# Altium PCB Assignment.PcbDoc
Units mm, origin at the board's own origin, x right, y up, seen from the top; angles counter-clockwise.
Board outline 84.33 x 68.07 mm, 2 copper layers (Top Layer, Bottom Layer); 49 components, 55 nets, 222 pads, 53 vias.
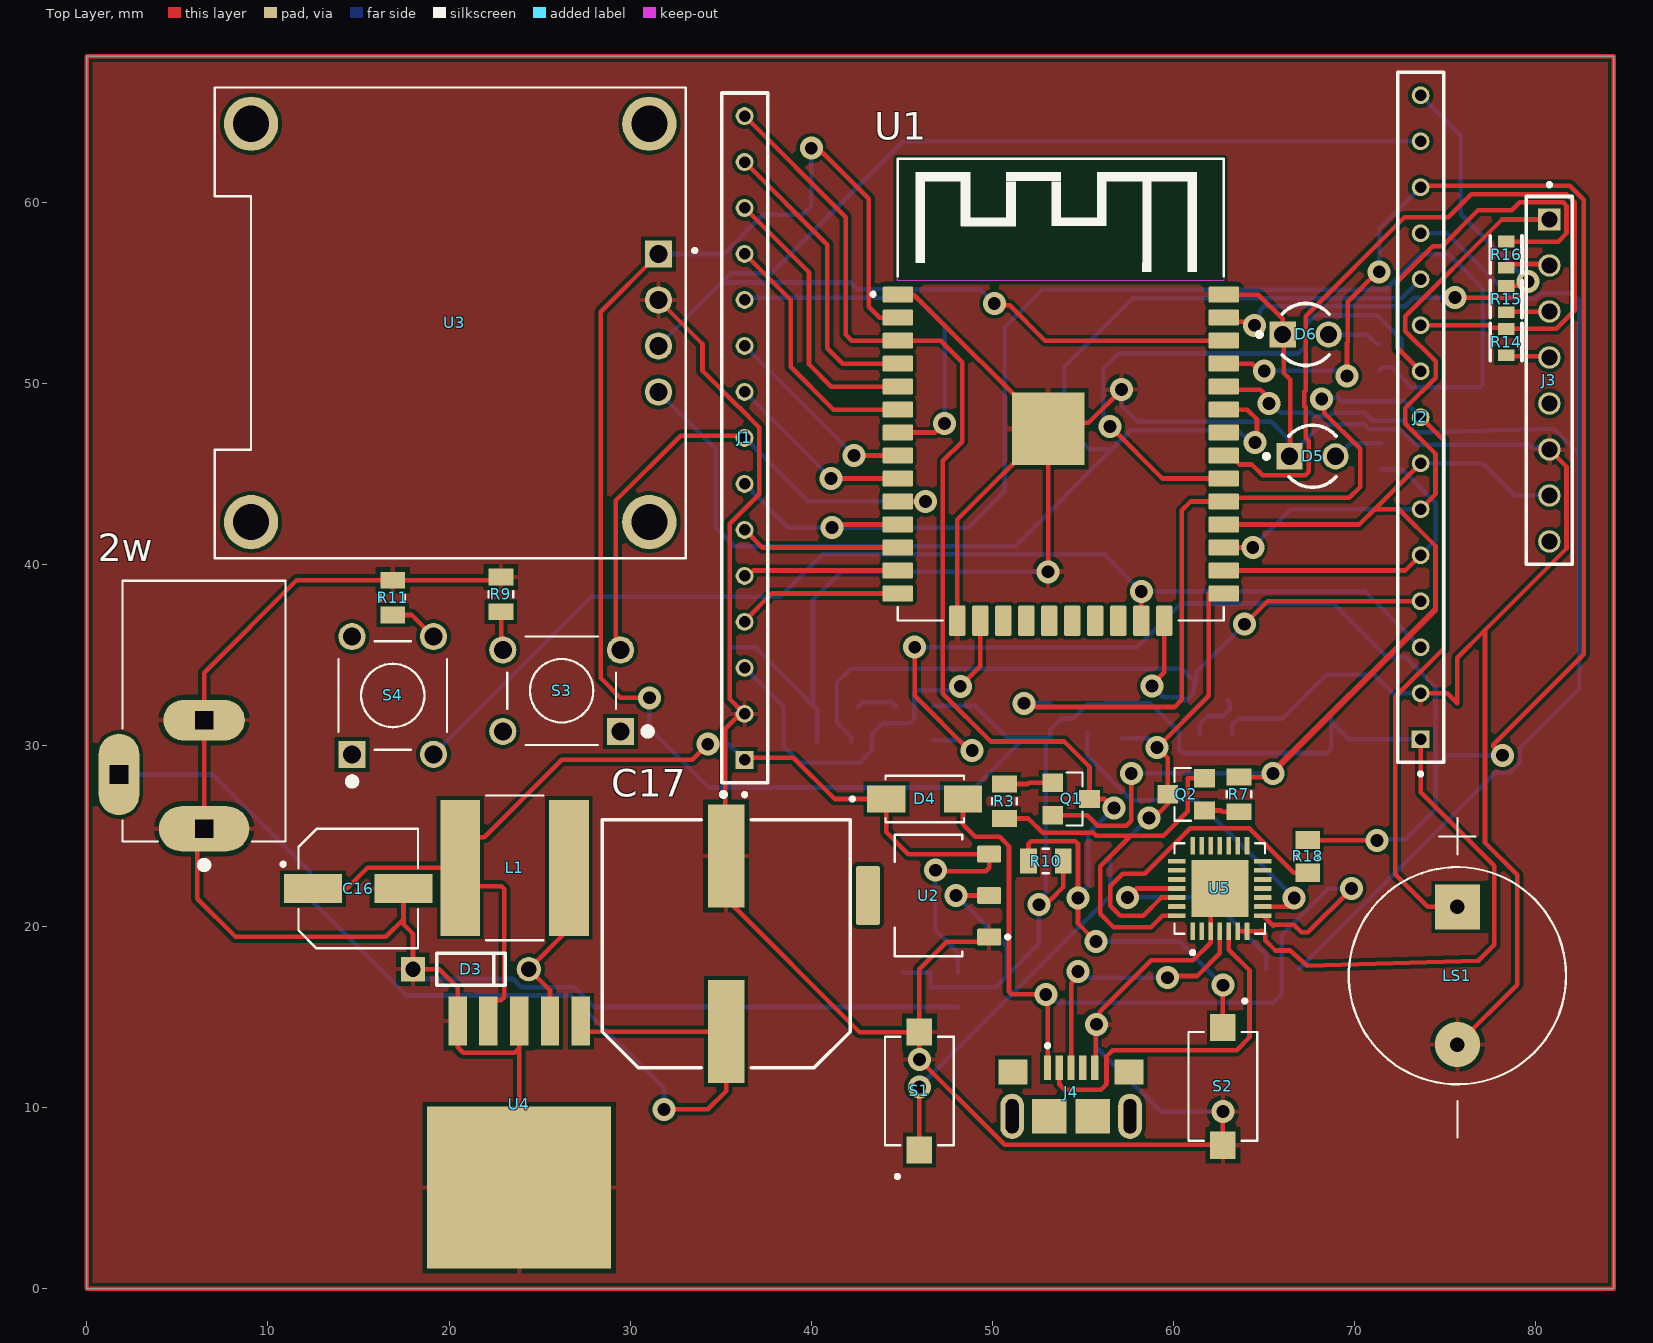
[diagram p0: Top Layer view]
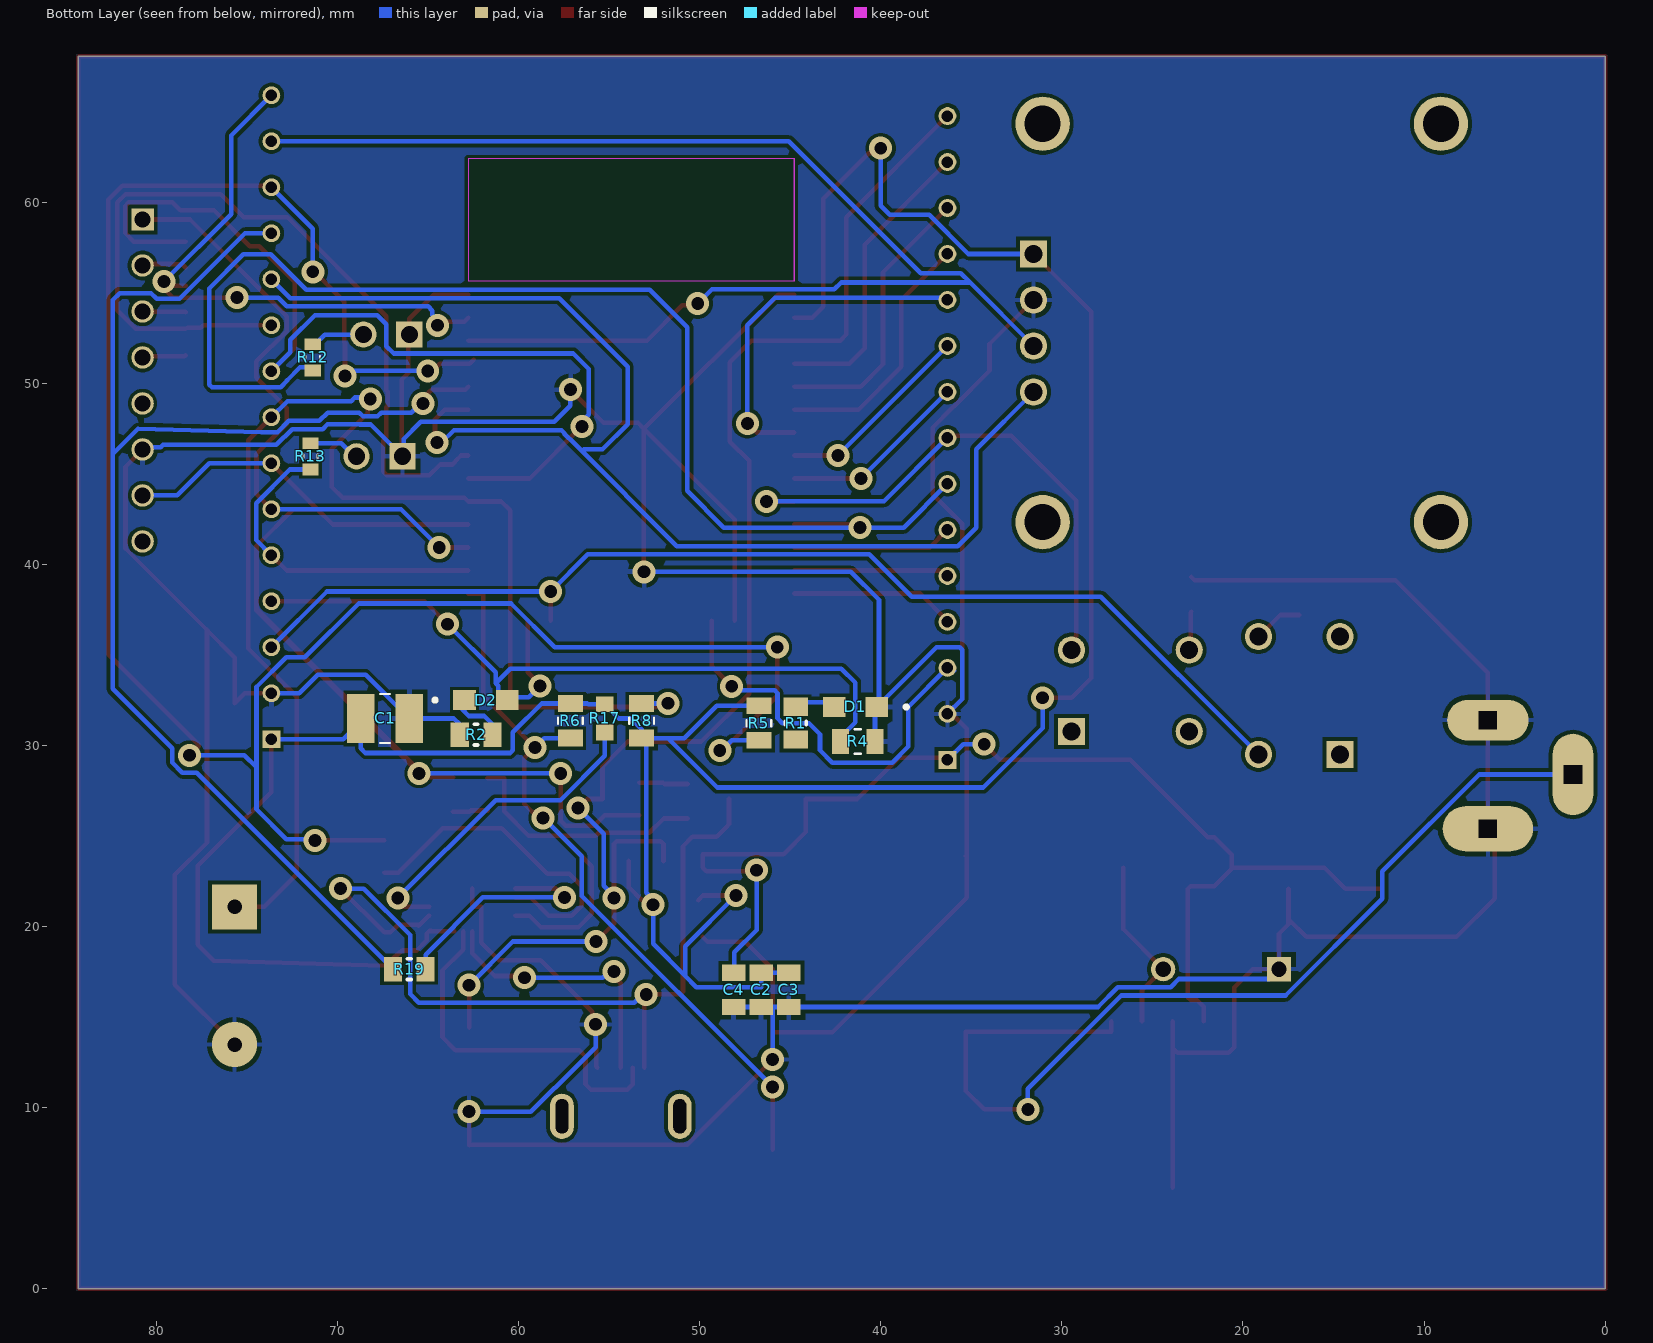
[diagram p1: Bottom Layer view, seen from below]
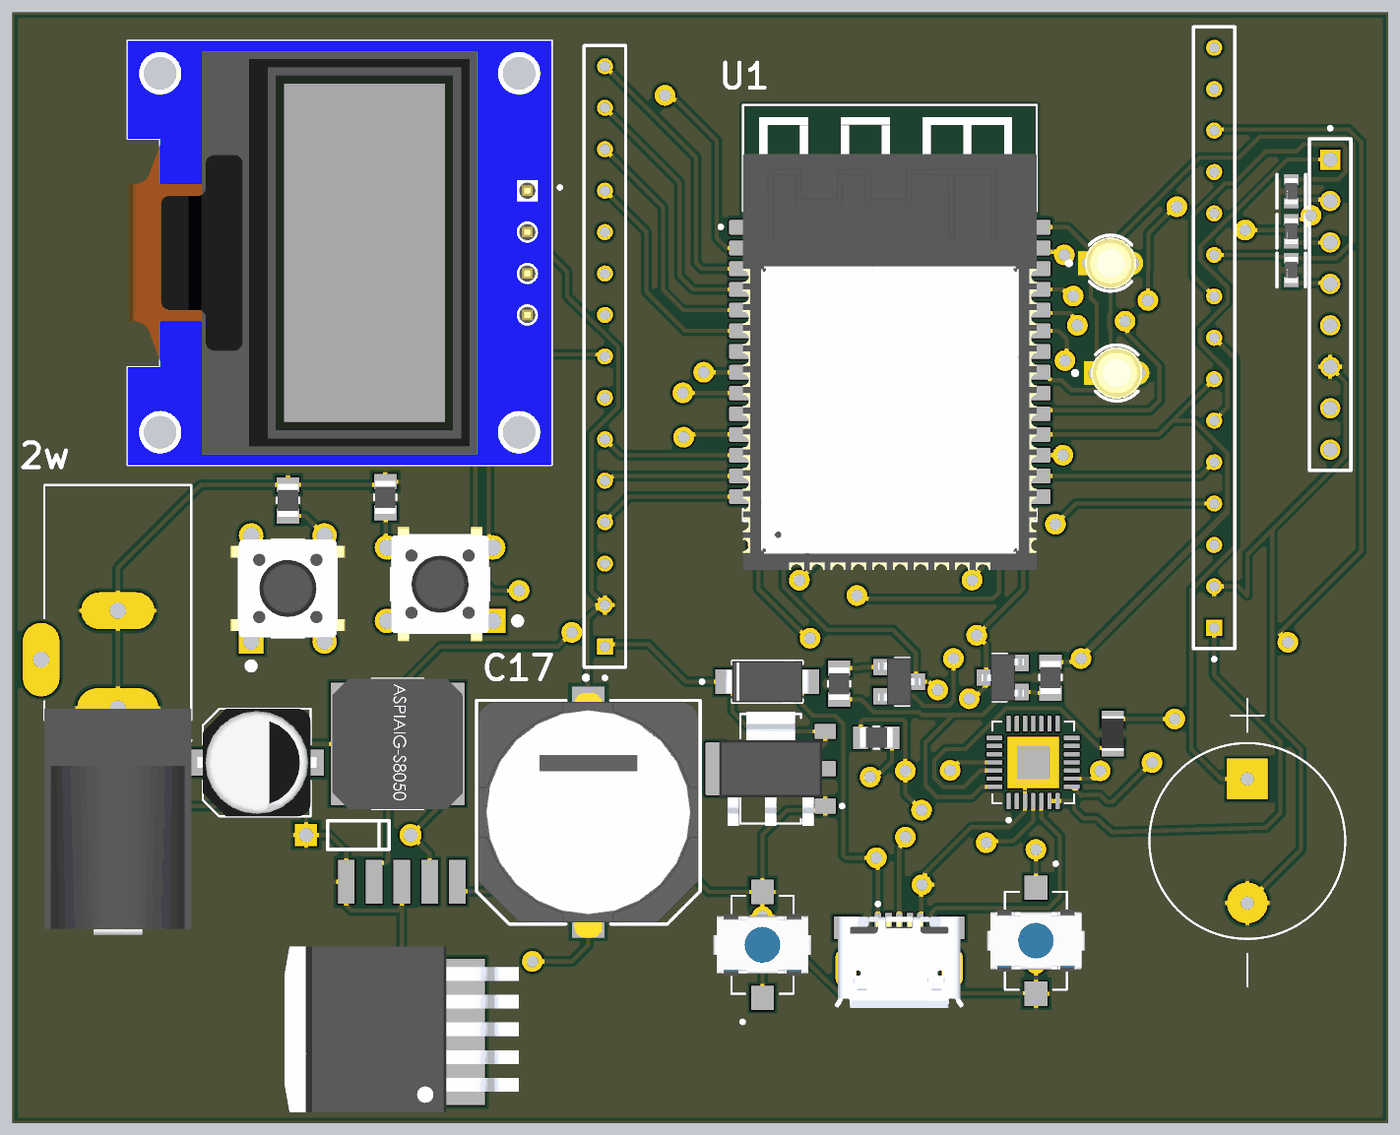
[diagram p2: 3D render of the assembled board from above, using the file's embedded part models]
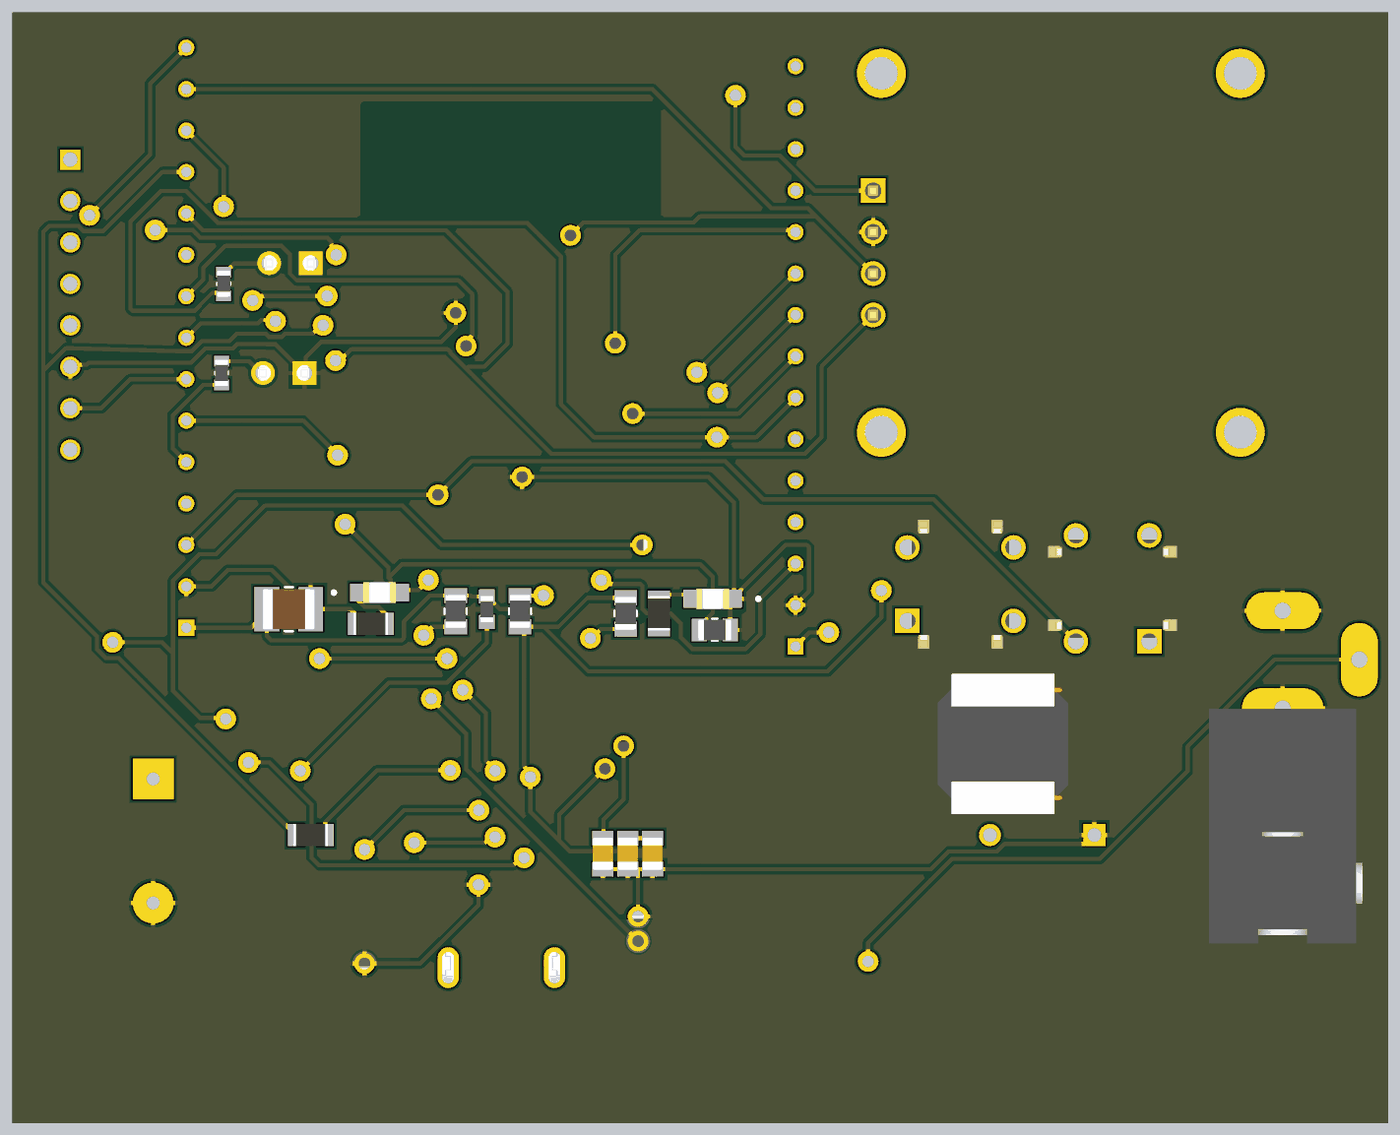
[diagram p3: 3D render of the assembled board from below, using the file's embedded part models]

## Layer stack, top to bottom
Top Solder: solder mask 0.0102, Solder Resist, Dk 3.5
Top Layer: signal copper 0.0356
Dielectric 1: dielectric 0.32, FR-4, Dk 4.8
Bottom Layer: signal copper 0.0356
Bottom Solder: solder mask 0.0102, Solder Resist, Dk 3.5

## Board outline
0,0 0,68.072 84.328,68.072 84.328,0

## Design rules (kind name [scope] priority, off if disabled: settings)
Clearance [All] p1: gap=0.2 ignorepadtopadclearanceinfootprint=TRUE
HoleSize [All] p1: absolutevalues=TRUE maxlimit=3.5 minlimit=0.025 maxpercent=80.000 minpercent=20.000
MinimumSolderMaskSliver [HasFootprint('No Footprint') vs HasFootprint('No Footprint')] p1: minsoldermaskwidth=0.02
PolygonConnect [All] p1: connectstyle=Relief reliefconductorwidth=0.254 reliefentries=4 polygonreliefangle="90 Angle" airgapwidth=0.254
RoutingVias [All] p1: holewidth=0.711 width=1.27 viastyle="Through Hole" minholewidth=0.711 minwidth=1.27 maxholewidth=0.711 maxwidth=1.27
SilkToSolderMaskClearance [IsPad] p1: minsilkscreentomaskgap=0.02 clearancetoexposedcopper=TRUE
SolderMaskExpansion [All] p1: expansion=0.102 istentingtop=FALSE
SupplyNets "Schematic Supply Nets_6" [InNet('VDD3V3')] p1: voltage=0.000
SupplyNets "Schematic Supply Nets_5" [InNet('12V')] p2: voltage=0.000
SupplyNets "Schematic Supply Nets_4" [InNet('3V3')] p3: voltage=0.000
SupplyNets "Schematic Supply Nets_3" [InNet('VCC3V3')] p4: voltage=0.000
SupplyNets "Schematic Supply Nets_2" [InNet('VIN')] p5: voltage=0.000
SupplyNets "Schematic Supply Nets_1" [InNet('VCCUSB')] p6: voltage=0.000
SupplyNets "Schematic Supply Nets" [InNet('GND')] p7: voltage=0.000
Width [All] p1: maxlimit=0.254 minlimit=0.254 preferedwidth=0.254
27 further rules are at their usual default settings.

## Classes and differential pairs
component class "Power Supply": 2w C16 C17 D3 L1 U4
component class "MCU & Peripherals": C1 C2 C3 C4 D1 D2 D4 D5 D6 J1 J2 J3 J4 LS1 Q1 Q2 R1 R2 R3 R4 R5 R6 R7 R8 R9 R10 R11 R12 R13 R14 R15 R16 R17 R18 R19 S1 S2 S3 S4 U1 U3 U5

## Components (designator, comment, footprint, x,y, rotation, side; value= is the part's Value field where it differs from the comment)
2w "PJ-002AH" CUI_PJ-002AH 6.47,25.403 r90 top (schematic designator J8)
C1 "GRM32EC70J107ME15L" CAPC3225X270N 67.381,31.496 r180 bottom
C2 "100nF" WCAP-CSGP_0805_L2W1.25H0.8_Reflow 46.609,16.51 r270 bottom
C3 "10μF" WCAP-CSGP_0805_L2W1.25H1.25 45.085,16.51 r270 bottom
C4 "10μF" WCAP-CSGP_0805_L2W1.25H1.25 48.133,16.51 r270 bottom
C16 "EEEFP0J221AP" CAP_EEEFP0J221AP 14.986,22.098 r0 top
C17 "EEV-FK1V681Q" FP-FKH13-MFG 35.306,19.05 r270 top
D1 "AP2012MGC" LED_AP2012MGC 41.402,32.131 r0 bottom
D2 "AP2012MGC" LED_AP2012MGC 61.817,32.512 r180 bottom
D3 "BAT46" STM-DO-35-2 21.209,17.653 r0 top
D4 "SS14" DIOM4325X250N 46.272,27.051 r0 top
D5 "HLMP-1719" FP-HLMP-1719-MFG 67.691,45.974 r0 top
D6 "HLMP-1719" FP-HLMP-1719-MFG 67.31,52.705 r0 top
J1 "TS-115-G-AA" SAMTEC_TS-115-G-AA 36.322,46.99 r90 top
J2 "TS-115-G-AA" SAMTEC_TS-115-G-AA 73.66,48.133 r90 top
J3 "RFID module connector" SAMTEC_SL-108-T-19 80.772,59.055 r90 top
J4 "2013499-1" TE_2013499-1 54.356,9.525 r0 top
L1 "ASPIAIG-S8050-330M-T" IND_ASPIAIG-S8050-330M-T 23.622,23.241 r180 top
LS1 "Buzzer" XDCR_CMI-1210-5-95T 75.692,17.289 r270 top
Q1 "SMD-TRANSISTORS-NPN-25V-500MW(SOT-23)" SOT-23 54.356,27.051 r270 top
Q2 "SMD-TRANSISTORS-NPN-25V-500MW(SOT-23)" SOT-23 60.706,27.305 r90 top
R1 "RC0805FR-071KL" RESC2013X60X35NL10T20 44.704,31.242 r90 bottom
R2 "RC0805FR-071KL" RESC2013X60X35NL10T20 62.357,30.607 r0 bottom
R3 "RC0805FR-0710KL" RESC2012X60N 50.673,26.924 r270 top
R4 "RC0805FR-0710KL" RESC2012X60N 41.275,30.226 r180 bottom
R5 "RC0805FR-0710KL" RESC2012X60N 46.736,31.242 r270 bottom
R6 "RC0805FR-0710KL" RESC2012X60N 57.15,31.369 r270 bottom
R7 "RC0805FR-0710KL" RESC2012X60N 63.627,27.305 r90 top
R8 "RC0805FR-0710KL" RESC2012X60N 53.213,31.369 r90 bottom
R9 "RC0805FR-0710KL" RESC2012X60N 22.86,38.354 r270 top
R10 "RC0805FR-0710KL" RESC2012X60N 52.959,23.622 r180 top
R11 "RC0805FR-0710KL" RESC2012X60N 16.891,38.166 r270 top
R12 "ERJPA3F5100V" RES_ERJPA3F5100V 71.374,51.435 r90 bottom
R13 "ERJPA3F5100V" RES_ERJPA3F5100V 71.501,45.974 r90 bottom
R14 "22" FP-ERJ3G-MFG 78.386,52.285 r90 top
R15 "22" FP-ERJ3G-MFG 78.386,54.661 r90 top
R16 "22" FP-ERJ3G-MFG 78.386,57.111 r90 top
R17 "CRG0603F4K7" RESC1608X55N 55.245,31.496 r270 bottom
R18 "RC0805FR-071KL" RESC2013X60X35NL10T20 67.437,23.876 r90 top
R19 "RC0805FR-071KL" RESC2013X60X35NL10T20 66.04,17.653 r0 bottom
S1 "TS10-63-26-BE-250-SMT-TR" SW_TS10-63-26-BE-250-SMT-TR 45.974,10.922 r90 top
S2 "TS10-63-26-BE-250-SMT-TR" SW_TS10-63-26-BE-250-SMT-TR 62.738,11.176 r270 top
S3 "FSM8JH" SW_FSM8JH 26.219,33.029 r180 top
S4 "FSM8JH" SW_FSM8JH 16.891,32.766 r90 top
U1 "ESP-WROOM-32" MODULE_ESP-WROOM-32 53.786,46.653 r0 top
U2 "AMS1117-3.3" SOT229P700X180-4N 46.482,21.717 r90 top
U3 "DM-OLED096-636" MODULE_DM-OLED096-636 20.066,53.34 r270 top
U4 "LM2596S-ADJ" TO170P1435X465-6N 23.876,5.74 r180 top
U5 "CP2102" QFN50P500X500X100-29N 62.568,22.106 r90 top

## Footprints (in the part's own frame and the unit in brackets; to place one, negate y for a bottom-side part, rotate by r counter-clockwise, add the part's x,y. Pads: shape width x height; smd on the part's side, far side on the other; paste and mask are expansions set on the pad)
CAP_EEEFP0J221AP [mm]
  rect 3.2x1.6 smd: 1(-2.5,0) 2(2.5,0)
  silkscreen extent -4.25,-3.3 3.3,3.3, body extent -3.65,-3.3 3.65,3.3, height 5.8
CAPC3225X270N [mm]
  rect 1.53x2.72 smd: 1(-1.341,0) 2(1.341,0)
  silkscreen extent -0.26,-1.35 0.26,1.35, body extent -1.6,-1.25 1.6,1.25, height 2.7
CUI_PJ-002AH [mm]
  oval 2.5x5 hole 1 square: 1(0,0)
  oval 2.25x4.5 hole 1 square: 2(6,0)
  oval 4.5x2.25 hole 1 square: 3(3,4.7)
  silkscreen extent -2.2,-4.5 13.7,4.5, body extent -14.4,-4.5 0,4.9, height 4.5
DIOM4325X250N [mm]
  rect 2.12x1.5 smd: A(2.115,0) C(-2.115,0)
  silkscreen extent -4.1,-1.28 2.16,1.28, body extent -2.57,-1.28 2.57,1.28, height 2.5
FP-ERJ3G-MFG [mm]
  rect 0.65x0.9 smd paste+0 mask+0: 1(-0.725,0) 2(0.725,0)
  silkscreen extent -1.03,-0.88 1.03,0.87, body extent -1.15,-0.58 1.15,0.58, height 0.25
FP-FKH13-MFG [mm]
  rect 5.7x2 smd paste+0 mask+0: 1(-4.85,0) 2(4.85,0)
  silkscreen extent -8.37,-6.85 6.85,6.85, body extent -7.95,-7.1 7.95,7.1, height 0.25
FP-HLMP-1719-MFG [mm]
  rect 1.45x1.45 hole 0.95 paste-2539.97 mask+0: 1(-1.27,0)
  round 1.45 hole 0.95 paste-2539.97 mask+0: 2(1.27,0)
  silkscreen extent -2.67,-1.71 1.3,1.71, body extent -2.22,-2.22 2.22,2.22, height 0.25
IND_ASPIAIG-S8050-330M-T [mm]
  rect 2.2x7.5 smd: 1(-3,0) 2(3,0)
  silkscreen extent -1.58,-4 1.58,4, body extent -4,-4.3 4,4.3, height 2.45
LED_AP2012MGC [mm]
  rect 1.25x1.1 smd: A(1.175,0) C(-1.175,0)
  silkscreen extent -2.9,-0.1 -2.7,0.1, body extent -1,-0.63 1,0.63, height 1.1
MODULE_DM-OLED096-636 [mm]
  rect 1.508x1.508 / inner round 1.508 / far side rect 1.508x1.508 hole 1: 1(-3.81,11.5)
  round 1.508 hole 1: 2(-1.27,11.5) 3(1.27,11.5) 4(3.81,11.5)
  round 3 hole 2: S1(-11,11) S2(11,11) S3(11,-11) S4(-11,-11)
  silkscreen extent -13,-13 13,13.6, body extent -13,-13 13,13, height 5.66
MODULE_ESP-WROOM-32 [mm]
  rrect22% 1.7x0.9 smd: 1(-9,8.255) 2(-9,6.985) 3(-9,5.715) 4(-9,4.445) 5(-9,3.175) 6(-9,1.905) 7(-9,0.635) 8(-9,-0.635) 9(-9,-1.905) 10(-9,-3.175) 11(-9,-4.445) 12(-9,-5.715) 13(-9,-6.985) 14(-9,-8.255) 25(9,-8.255) 26(9,-6.985) 27(9,-5.715) 28(9,-4.445) 29(9,-3.175) 30(9,-1.905) 31(9,-0.635) 32(9,0.635) 33(9,1.905) 34(9,3.175) 35(9,4.445) 36(9,5.715) 37(9,6.985) 38(9,8.255)
  rect 4x4 smd: 1.1(-0.7,0.845)
  rrect22% 0.9x1.7 smd: 15(-5.715,-9.755) 16(-4.445,-9.755) 17(-3.175,-9.755) 18(-1.905,-9.755) 19(-0.635,-9.755) 20(0.635,-9.755) 21(1.905,-9.755) 22(3.175,-9.755) 23(4.445,-9.755) 24(5.715,-9.755)
  Keep-Out Layer region: 9,9.012 -9.012,9.012 -9.012,15.75 9,15.75
  Keep-Out Layer region: 9,9.026 -9.026,9.026 -9.026,15.75 9,15.75
  silkscreen extent -10.46,-9.75 9,15.75, body extent -9,-12.75 9,12.75, height 3.25
QFN50P500X500X100-29N [mm]
  rrect25% 0.97x0.26 smd: 1(-2.37,1.5) 2(-2.37,1) 3(-2.37,0.5) 4(-2.37,0) 5(-2.37,-0.5) 6(-2.37,-1) 7(-2.37,-1.5) 15(2.37,-1.5) 16(2.37,-1) 17(2.37,-0.5) 18(2.37,0) 19(2.37,0.5) 20(2.37,1) 21(2.37,1.5)
  rrect25% 0.26x0.97 smd: 8(-1.5,-2.37) 9(-1,-2.37) 10(-0.5,-2.37) 11(0,-2.37) 12(0.5,-2.37) 13(1,-2.37) 14(1.5,-2.37) 22(1.5,2.37) 23(1,2.37) 24(0.5,2.37) 25(0,2.37) 26(-0.5,2.37) 27(-1,2.37) 28(-1.5,2.37)
  rect 3.15x3.15 smd paste-0.575: 29(0,0)
  silkscreen extent -3.64,-2.5 2.5,2.5
RES_ERJPA3F5100V [mm]
  rect 0.65x0.9 smd: 1(-0.725,0) 2(0.725,0)
  silkscreen extent -0.08,-0.4 0.08,0.4, body extent -0.8,-0.4 0.8,0.4, height 0.45
RESC1608X55N [mm]
  rect 0.87x0.97 smd: 1(-0.78,0) 2(0.78,0)
  body extent -0.8,-0.4 0.8,0.4, height 0.55
RESC2012X60N [mm]
  rect 0.92x1.38 smd: 1(-0.955,0) 2(0.955,0)
  silkscreen extent -0.17,-0.68 0.17,0.68, body extent -1,-0.63 1,0.63, height 0.6
RESC2013X60X35NL10T20 [mm] "Chip Resistor, 2-Leads, Body 2.1x1.35mm, IPC Medium Density"
  rect 1x1.35 smd: 1(-0.9,0) 2(0.9,0)
  silkscreen extent -0.1,-0.58 0.1,0.58, body extent -1.05,-0.68 1.05,0.67, height 0.6
SAMTEC_SL-108-T-19 [mil]
  rect 48.78x48.78 hole 35: 01(0,0)
  round 48.78 hole 35: 02(-100,0) 03(-200,0) 04(-300,0) 05(-400,0) 06(-500,0) 07(-600,0) 08(-700,0)
  silkscreen extent -750,-50 80,50
SAMTEC_TS-115-G-AA [mm]
  rect 0.985x0.985 hole 0.635: 01(-17.78,0)
  round 0.985 hole 0.635: 02(-15.24,0) 03(-12.7,0) 04(-10.16,0) 05(-7.62,0) 06(-5.08,0) 07(-2.54,0) 08(0,0) 09(2.54,0) 10(5.08,0) 11(7.62,0) 12(10.16,0) 13(12.7,0) 14(15.24,0) 15(17.78,0)
  silkscreen extent -19.8,-1.27 19.05,1.27
SOT229P700X180-4N [mm]
  rrect15% 0.93x1.31 smd: 1(-2.29,-3.345) 2(0,-3.345) 3(2.29,-3.345)
  rrect15% 3.24x1.31 smd: 4(0,3.345)
  silkscreen extent -3.36,-4.47 3.36,1.86, body extent -3.5,-3.15 3.5,3.15, height 1.8
SOT-23 [mil]
  rect 40x45 smd: 1(-35,-40) 2(35,-40) 3(0,40)
  silkscreen extent -58,-10 58,25, body extent -57,-51 57,51, height 55
STM-DO-35-2 [mm] "THD, 2-Leads, Dia 1.765 mm, Body Length 3.775 mm"
  rect 1.35x1.35 hole 0.85: 1(-3.2,0)
  round 1.35 hole 0.85: 2(3.2,0)
  silkscreen extent -1.89,-0.88 1.89,0.88, body extent -1.89,-0.88 1.89,0.88, height 1.76
SW_FSM8JH [mm]
  rect 1.498x1.498 / inner round 1.498 / far side rect 1.498x1.498 hole 0.99: 1(-3.25,2.25)
  round 1.498 hole 0.99: 2(-3.25,-2.25) 3(3.25,2.25) 4(3.25,-2.25)
  silkscreen extent -4.95,-3 3,3, body extent -3,-3.95 3,3.95, height 9.5
SW_TS10-63-26-BE-250-SMT-TR [mm]
  rect 1.5x1.4 smd: 1(-3.25,0) 2(3.25,0)
  silkscreen extent -4.82,-1.9 3,1.9, body extent -1.9,-3.7 1.9,3.7, height 2.2
TE_2013499-1 [mm]
  rect 0.4x1.35 smd: 1(-1.3,2.675) 2(-0.65,2.675) 3(0,2.675) 4(0.65,2.675) 5(1.3,2.675)
  rect 1.6x1.4 smd: SH1(-3.2,2.45) SH4(3.2,2.45)
  rect 1.9x1.9 smd: SH2(-1.2,0) SH3(1.2,0)
  oval 1.31x2.5 hole 0.71 slot 1.9 at 90 deg: SH5(3.255,0) SH6(-3.255,0)
  silkscreen extent -1.4,3.8 -1.2,4, body extent -4,-2.49 4,3.11, height 2.76
TO170P1435X465-6N [mil]
  rect 40x106 smd: 1(-134,-356) 2(-67,-356) 3(0,-356) 4(67,-356) 5(134,-356)
  rect 400x352 smd: 6(0,6)
  body extent -282,-200 282,200, height 183
WCAP-CSGP_0805_L2W1.25H0.8_Reflow [mm] "Ceramic Capacitors, body 2x1.25mm"
  rect 0.9x1.3 smd: 1(-0.95,0) 2(0.95,0)
  body extent -1,-0.62 1,0.63, height 0.8
WCAP-CSGP_0805_L2W1.25H1.25 [mm] "Ceramic Capacitors, body 2x1.25mm"
  rect 0.9x1.3 smd: 1(-0.95,0) 2(0.95,0)
  body extent -1,-0.63 1,0.63, height 1.25
XDCR_CMI-1210-5-95T [mm]
  round 2.5 hole 0.8: N(3.8,0)
  rect 2.5x2.5 / inner round 2.5 / far side rect 2.5x2.5 hole 0.8: P(-3.8,0)
  silkscreen extent -8.69,-6 8.92,6

## Part data
2w: "2.0 x 6.5 mm, 5.0 A, Horizontal, Through Hole, Dc Power Jack Connector", Package=None, Check_prices=https://www.snapeda.com/parts/PJ-002AH/Same+Sky/view-part/?ref=eda, MF="Same Sky", MP=PJ-002AH, SnapEDA_Link=https://www.snapeda.com/parts/PJ-002AH/Same+Sky/view-part/?ref=snap
C1: "SMD capacitor X7S(EIA) with capacitance 100uF Tol.20%. Rated voltage 6.3Vdc 125C", Package="3225 Murata", Check_prices=https://www.snapeda.com/parts/GRM32EC70J107ME15L/Murata+Electronics+North+America/view-part/?ref=eda, MF="Murata Electronics", MP=GRM32EC70J107ME15L, SnapEDA_Link=https://www.snapeda.com/parts/GRM32EC70J107ME15L/Murata+Electronics+North+America/view-part/?ref=snap
C2: library part 885012207072, "WCAP-CSGP Multilayer Ceramic Chip Capacitor, General Purpose, size 0805, X7R, 100nF, 25V", Capacitance Tolerance=+/-10%, Case/Size Code=0805, Insulation Resistance=5GΩ, Manufacturer="Wurth Elektronik", Max Operating Temperature=125°C, Min Operating Temperature=-55°C, Rated Voltage (DC)=25V, Capacitance=100nF, Category="Multilayer Ceramic Chip Capacitors", Ceramic Type=X7R, ComponentLink1Description="Website Link", ComponentLink1URL=https://www.we-online.com/redexpert/article/885012207072?ad, ComponentLink2Description="Datasheet Link", ComponentLink2URL=https://www.we-online.com/redexpert/spec/885012207072?ad, Dissipation Factor=3.5%, Height=0.8mm, Length=2mm, Manufacturer Part Number=885012207072, Match Code=WCAP-CSGP, Mount="Surface Mount", Packaging="Tape and Reel", Technical Reference=X7R0805104K025DFCT10000, Width=1.25mm
C3 C4: library part 885012107027, "WCAP-CSGP Multilayer Ceramic Chip Capacitor, General Purpose, size 0805, X5R Class II, 10μF, 25V", Capacitance Tolerance=+/-10%, Case/Size Code=0805, Insulation Resistance=0.005GΩ, Manufacturer="Wurth Elektronik", Max Operating Temperature=85°C, Min Operating Temperature=-55°C, Rated Voltage (DC)=25V, Capacitance=10μF, Category="Multilayer Ceramic Chip Capacitors", Ceramic Type="X5R Class II", ComponentLink1Description="Website Link", ComponentLink1URL=https://www.we-online.com/redexpert/article/885012107027?ad, ComponentLink2Description="Datasheet Link", ComponentLink2URL=https://www.we-online.com/redexpert/spec/885012107027?ad, Dissipation Factor=12.5%, Height=1.25mm, Length=2mm, Manufacturer Part Number=885012107027, Match Code=WCAP-CSGP, Mount="Surface Mount", Packaging="Tape and Reel", Technical Reference=X5R0805106K025DFCT10000, Width=1.25mm
C16: "CAP ALUM 220UF 20% 6.3V SMD", Package="RADIAL-2 Panasonic", Check_prices=https://www.snapeda.com/parts/EEEFP0J221AP/Panasonic/view-part/?ref=eda, MF=Panasonic, MP=EEEFP0J221AP, SnapEDA_Link=https://www.snapeda.com/parts/EEEFP0J221AP/Panasonic/view-part/?ref=snap
C17: library part CMP-05427-002172-1, "CAP ALUM 680UF 20% 35V SMD", Capacitance=680uF, Case/Package=Radial, ESR (Equivalent Series Resistance)=60mR, Leakage Current=3uA, Max Operating Temperature=105°C, Min Operating Temperature=-55°C, Package Quantity=200, Ratings=AEC-Q200, Ripple Current=1.1A, Tolerance=20%, Voltage=35V, Construction=Cylindrical, Contact Plating=Tin, Diameter=12.5mm, Height=13.5mm, Height - Seated (Max)=0.531inch, Impedance=60mR, Lead Free="Lead Free", Length=14mm, Life (Hours)=5000Hour, Material=Aluminium, Mount="Surface Mount", Packaging="Tape and Reel", Radiation Hardening=No, Reach SVHC Compliant=Yes, Ripple Current (AC)=1.1A, RoHS Compliant=Yes, Series=FK, Termination=SMD/SMT, Voltage Rating=35V, Voltage Rating (DC)=35V, Width=900um
D1 D2: "Green 2 x 1.25 x 1.1 mm 120Â° Water Clear 70 mcd 2.1 V Chip LED Lamp SMT", Package="0805 Kingbright", Check_prices=https://www.snapeda.com/parts/AP2012MGC/Kingbright/view-part/?ref=eda, MF=Kingbright, MP=AP2012MGC, SnapEDA_Link=https://www.snapeda.com/parts/AP2012MGC/Kingbright/view-part/?ref=snap
D3: library part CMP-2000-05926-1, "Small Signal Schottky Diode, 150 mA, 100 V, -65 to 125 degC, 2-Pin DO-35, RoHS, Tape and Reel", Diode Case Style=DO-204AH, Forward Current If(AV)=150mA, Forward Surge Current Ifsm Max=750mA, Forward Voltage VF Max=1V, Manufacturer=STMicroelectronics, Operating Temperature Max=125°C, Package Description="2-Pin Axial Lead, Dia 1.765 mm, Body Length 3.775 mm", Package Reference=DO-35-2, Repetitive Reverse Voltage Vrrm Max=100V, Datasheet URL=http://www.st.com/content/ccc/resource/technical/document/datasheet/group1/11/76/e4/a3/df/07/49/14/CD00000767/files/CD00000767.pdf/jcr:content/translations/en.CD00000767.pdf, Datasheet Version="Rev. 2.1, 10/2001", Diode Configuration=Single, Diode Type=Schottky, Manufacturer URL=http://www.st.com/, Mounting Technology=ThroughHole, No. of Pins=2Pins, Packaging=Tape&Reel, Product Range=-, SVHC=NoSVHC(15-Jun-2015)
D4: "1A, 40V, Schottky Rectifier", Package="SMA-2 Taiwan Semiconductor", Check_prices=https://www.snapeda.com/parts/SS14/taiwan/view-part/?ref=eda, MF="Taiwan Semiconductor", MP=SS14, SnapEDA_Link=https://www.snapeda.com/parts/SS14/taiwan/view-part/?ref=snap
D5 D6: library part CMP-2000-06410-2, "LED YELLOW DIFFUSED T-1 T/H", Colour=Yellow, Forward Current=2mA, Forward Voltage=1.8V, Manufacturer=Broadcom, Package=0, Power Dissipation=17.5mW, Reverse Voltage=5V, Temperature="-40°C to +100°C", Temperature Range High=+100°C, Temperature Range Low=-40°C, Automotive=No, Category=Diode, ComponentLink2Description=Datasheet, ComponentLink2URL=https://docs.broadcom.com/docs/AV02-1557EN, Device Class L1=Optoelectronics, Device Class L2=LEDs, Device Class L3=unset, Digikey Description="LED YELLOW DIFFUSED T-1 T/H", Lead Free=Yes, Led Orientation=Straight, Luminous Intensity=2.1mcd, Manufacturer Part Number=HLMP-1719, Mouser Description="Standard LEDs - Through Hole Yellow Diffused 585nm 2.1mcd", Octopart=https://octopart.com/hlmp-1719-broadcom-71130405, RoHS=TRUE, Viewing Angle=50°, Wavelength=585nm
J1 J2 J4: Package=None, Availability=Unavailable, Price=None
  J1 J2: MF=Samtec, MP=TS-115-G-AA
  J4: MP=2013499-1
J3: library part SL-108-T-19, Package=None, Availability=Unavailable, MP=SL-108-T-19, Price=None
L1: "Inductor Power Shielded Wirewound 33uH 20% 100KHz Ferrite 2A 122mOhm DCR 3131 Automotive T/R", Package="Nonstandard Abracon", Availability="In Stock", Check_prices=https://www.snapeda.com/parts/ASPIAIG-S8050-330M-T/Abracon+LLC/view-part/?ref=eda, MF="Abracon LLC", MP=ASPIAIG-S8050-330M-T, Price=None, Purchase-URL=https://pricing.snapeda.com/search/part/ASPIAIG-S8050-330M-T/?ref=eda, SnapEDA_Link=https://www.snapeda.com/parts/ASPIAIG-S8050-330M-T/Abracon+LLC/view-part/?ref=snap
LS1: library part CMI-1210-5-95T, Package=None, Availability=Unavailable, MP=CMI-1210-5-95T, Price=None
Q1 Q2: "Bipolar (BJT) Transistor NPN 25 V 500 mA 150MHz 300 mW Surface Mount SOT-23", Package=None, Availability="In Stock", Check_prices=https://www.snapeda.com/parts/S8050/Umwelt+Sensor+Teknik/view-part/?ref=eda, MF=UMW, MP=S8050, Price=None, Purchase-URL=https://pricing.snapeda.com/search/part/S8050/?ref=eda, SnapEDA_Link=https://www.snapeda.com/parts/S8050/Umwelt+Sensor+Teknik/view-part/?ref=snap
R1 R2 R18 R19: library part CMP-2100-03671-1, "Chip Resistor, 1 KOhm, +/- 1%, 125 mW, -55 to 155 degC, 0805 (2012 Metric), RoHS, Tape and Reel", Case Code (Imperial)=0805, Case Code (Metric)=2012, Manufacturer=Yageo, Max Operating Temperature=155degC, Max Power Dissipation=125mW, Min Operating Temperature=-55degC, Package Description="2-Pin Surface Mounted Device, Body 2 x 1.25 mm", Package Quantity=1, Resistance=1KOhm, Temperature Coefficient=100ppm/degreesC, Tolerance=1%, Voltage Rating=150V, Case/Package=0805, Composition=ThickFilm, Datasheet URL=http://www.yageo.com/NewPortal/yageodocoutput?fileName=/pdf/R-Chip/PYu-RC_Group_51_RoHS_L_5.pdf, Datasheet Version="Rev. 5, 10/2016", Depth=1.25mm, Height=0.024inch, Lead Free=LeadFree, Length=0.079inch, Manufacturer URL=http://www.yageo.com/, Military Standard=Not, Number of Pins=2, Number of Terminations=2, Package Reference=0805, Packaging=TapeandReel, Power Rating=125mW, REACH SVHC=Unknown, RoHSCompliant=true, Termination=SMD/SMT, Voltage Rating (DC)=150V, Width=0.049inch
R3 R4 R5 R6 R7 R8 R9 R10 R11: "10 kOhms Â±1% 0.125W, 1/8W Chip Resistor 0805 (2012 Metric) Moisture Resistant Thick Film", Package="2012 Rohm Semiconductor", Availability="In Stock", Check_prices=https://www.snapeda.com/parts/RC0805FR-0710KL/Yageo/view-part/?ref=eda, MF=Yageo, MP=RC0805FR-0710KL, Price=None, Purchase-URL=https://pricing.snapeda.com/search/part/RC0805FR-0710KL/?ref=eda, SnapEDA_Link=https://www.snapeda.com/parts/RC0805FR-0710KL/Yageo/view-part/?ref=snap
R12 R13: "RES, THICK FILM, 510R, 1%, 0.25W, 0603", Package="1608-2 Panasonic", Check_prices=https://www.snapeda.com/parts/ERJ-PA3F5100V/Panasonic/view-part/?ref=eda, MF=Panasonic, MP=ERJ-PA3F5100V, SnapEDA_Link=https://www.snapeda.com/parts/ERJ-PA3F5100V/Panasonic/view-part/?ref=snap
R14 R15 R16: library part CMP-2000-00745-2, "RES SMD 22 OHM 5% 1/10W 0603", Case Code (Imperial)=0603, Case Code (Metric)=1608, Max Operating Temperature=155°C, Max Power Dissipation=100mW, Min Operating Temperature=-55°C, Package Quantity=1, Resistance=22R, Resistance Tolerance=5%, Resistor Type="Thick Film", Temperature Coefficient=200ppm/°C, Voltage Rating=75V, Voltage Rating (DC)=50V, Case/Package=0603, Construction=Rectangular, Contact Plating=Tin, Depth=0.8mm, Features="Automotive AEC-Q200", Height=0.45mm, Lead Free="Lead Free", Length=1.6mm, Military Standard=Not, Mount="Surface Mount", Number of Terminations=2, Packaging="Tape and Reel", Power Rating=100mW, Radiation Hardening=No, REACH SVHC="No SVHC", RoHS Compliant=Yes, Series=ERJ, Technology="THICK FILM", Termination=SMD/SMT, Tolerance=5%, Width=0.031inch
R17: "Resistor, Thick Film, Res 4.7 Kilohms, Pwr-Rtg 0.1 W, Tol 1%, SMT, 0603", Package=0603, Power_Rating=".1 W", Resistance=4.7K, Tolerance=1%, Voltage_Rating="50 V", Check_prices=https://www.snapeda.com/parts/CRG0603F4K7/TE+Connectivity+Passive+Product/view-part/?ref=eda, EU_RoHS_Compliance="Compliant with Exemptions", MF="TE Connectivity", MP=CRG0603F4K7, SnapEDA_Link=https://www.snapeda.com/parts/CRG0603F4K7/TE+Connectivity+Passive+Product/view-part/?ref=snap
S1 S2: "6.1 x 3.8 mm, 2.6 mm Actuator Height, 250 gf, Surface Mount, SPST, Tactile Switch", Package=None, Check_prices=https://www.snapeda.com/parts/TS10-63-26-BE-250-SMT-TR/Same+Sky/view-part/?ref=eda, MF="Same Sky", MP=TS10-63-26-BE-250-SMT-TR, SnapEDA_Link=https://www.snapeda.com/parts/TS10-63-26-BE-250-SMT-TR/Same+Sky/view-part/?ref=snap
S3 S4: "Tactile Switch SPST-NO Top Actuated Through Hole", Package=None, Availability="In Stock", Check_prices=https://www.snapeda.com/parts/FSM8JH/TE+Connectivity+ALCOSWITCH+Switches/view-part/?ref=eda, MF="TE Connectivity", MP=FSM8JH, Price=None, SnapEDA_Link=https://www.snapeda.com/parts/FSM8JH/TE+Connectivity+ALCOSWITCH+Switches/view-part/?ref=snap
U1: "Transceptor serie ESP-WROOM-32; Placa de evaluaciÃ³n 802.11 b/g/n (Wi-Fi, WiFi, WLAN), BluetoothÂ® Smart 4.x de bajo consumo (BLE)", Package="Module Espressif Systems", Check_prices=https://www.snapeda.com/parts/ESP-WROOM-32/Espressif+Systems/view-part/?ref=eda, MF="Espressif Systems", MP=ESP-WROOM-32, SnapEDA_Link=https://www.snapeda.com/parts/ESP-WROOM-32/Espressif+Systems/view-part/?ref=snap
U2: "Linear Voltage Regulator IC Positive Fixed 1 Output 1A SOT-223-3L", Package="SOT-223-3L UMW", Check_prices=https://www.snapeda.com/parts/AMS1117-3.3/UMW/view-part/?ref=eda, MF=UMW, MP=AMS1117-3.3, SnapEDA_Link=https://www.snapeda.com/parts/AMS1117-3.3/UMW/view-part/?ref=snap
U3: "0.96â€ 128 X 64 MONOCHROME GRAPHIC OLED DISPLAY MODULE - I2C", Package=Package, Check_prices=https://www.snapeda.com/parts/DM-OLED096-636/Display+Module/view-part/?ref=eda, MF="Display Module", MP=DM-OLED096-636, SnapEDA_Link=https://www.snapeda.com/parts/DM-OLED096-636/Display+Module/view-part/?ref=snap
U4: "Buck Switching Regulator IC Positive Adjustable 1.2V 1 Output 3A TO-263-6, DÂ²Pak (5 Leads + Tab), TO-263BA", Package=None, Check_prices=https://www.snapeda.com/parts/LM2596S-ADJ/Umwelt+Sensor+Teknik/view-part/?ref=eda, MF=UMW, MP=LM2596S-ADJ, SnapEDA_Link=https://www.snapeda.com/parts/LM2596S-ADJ/Umwelt+Sensor+Teknik/view-part/?ref=snap
U5: "CP2102N USB 2.0 to UART (RS232) Bridge Interface Evaluation Board", Package="WFQFN-20 Silicon Labs", Availability="In Stock", Check_prices=https://www.snapeda.com/parts/CP2102/Silicon+Labs/view-part/?ref=eda, MF="Silicon Labs", MP=CP2102, Price=None, Purchase-URL=https://pricing.snapeda.com/search/part/CP2102/?ref=eda, SnapEDA_Link=https://www.snapeda.com/parts/CP2102/Silicon+Labs/view-part/?ref=snap

## Via types
v1: diameter 1.27, hole 0.711, Top Layer to Bottom Layer, 53 vias

## Nets (pads, with @x,y where several pads share a name; then routed paths per layer and width w, separated by ;. In a path a pad name is that pad's centre, name@x,y a point inside that pad or via, vN(x,y) a via of type N, cw(c..) or ccw(c..) an arc to the next point about the centre after c; other vN are vias at no path point)
3V3: J3.08
12V: 2w.3 C17.2 U4.1 | length 55.1
  Top Layer w0.254: U4.1 27.28,14.2 C17.2 35.306,10.922 34.29,9.906 v1(31.877,9.906)
  Bottom Layer w0.254: 2w.3 6.95,28.403 12.301,23.052 12.301,21.548 17.653,16.197 26.729,16.197 31.877,11.049 v1(31.877,9.906)
A4: J1.10 U1.8 | length 11
  Top Layer w0.254: v1(42.374,46.018) U1.8
  Bottom Layer w0.254: J1.10 v1(42.374,46.018)
A5: J1.09 U1.9 | length 10.4
  Top Layer w0.254: v1(41.097,44.755) 41.104,44.748 U1.9
  Bottom Layer w0.254: J1.09 v1(41.097,44.755)
A6: J1.12 U1.6 | length 14.2
  Top Layer w0.254: J1.12 38.862,54.61 38.862,50.927 41.231,48.558 U1.6
A7: J1.11 U1.7 | length 19.9
  Top Layer w0.254: U1.7 46.863,47.288 v1(47.371,47.796)
  Bottom Layer w0.254: J1.11 36.449,54.737 45.847,54.737 47.371,53.213 v1(47.371,47.796)
A8: J1.08 S3.2 U1.10 | length 30
  Top Layer w0.254: S3.2 29.231,35.517 29.231,36.029 29.21,36.05 29.21,43.536 29.223,43.549 32.791,47.117 36.195,47.117 J1.08 ; U1.10 46.307,43.478 v1(46.307,43.485)
  Bottom Layer w0.254: J1.08 39.827,43.485 v1(46.307,43.485)
A9: J1.07 R12.1 U1.11 | length 69.4
  Top Layer w0.254: v1(41.148,42.037) 41.319,42.208 U1.11
  Bottom Layer w0.254: J1.07 38.735,42.037 v1(41.148,42.037) 48.666,42.037 50.698,44.069 50.698,53.111 52.756,55.169 71.737,55.169 73.696,57.128 75.206,57.128 77.089,55.245 77.089,49.933 76.94,49.784 73.152,49.784 72.796,50.165 72.078,50.883 71.547,50.883 R12.1
DTR: Q2.2 R3.2 U5.28 | length 23.6
  Top Layer w0.254: R3.2 51.991,25.969 52.782,25.178 55.59,25.178 55.749,25.019 57.658,25.019 ; U5.28 59.405,20.606 58.77,19.971 56.696,19.971 55.966,20.701 55.966,23.327 57.658,25.019 ; Q2.2 60.808,28.194 60.808,26.365 59.461,25.019 57.658,25.019
EN: J1.15 Q1.3 R10.2 S2.1 U1.3 | length 79
  Top Layer w0.254: J1.15 41.91,59.182 41.91,52.705 42.247,52.368 U1.3 47.149,52.368 48.336,51.181 48.336,46.787 47.269,45.72 47.269,32.868 49.911,30.226 53.975,30.226 55.372,28.829 Q1.3 56.21,27.051 v1(56.718,26.543) ; R10.2 52.004,24.572 52.156,24.724 54.588,24.724 54.737,24.575 v1(54.737,21.59) 54.737,20.17 v1(55.73,19.177) ; S2.1 v1(62.738,16.764)
  Bottom Layer w0.254: v1(54.737,21.59) 54.737,21.682 55.302,22.247 55.302,25.127 v1(56.718,26.543) ; v1(55.73,19.177) 60.325,19.177 v1(62.738,16.764)
GND: 2w.1 2w.2 C1.2 C2.2 C3.2 C4.2 C16.2 C17.1 D1.C D3.1 D5.1 D6.1 J1.02 J2.02 J3.06 J4.5 LS1.N R2.2 R4.2 R9.1 R11.1 S1.2 S2.2 U1.1 U1.1.1 U1.15 U1.38 U2.1 U3.2 U4.3 U4.5 U4.6 U5.3 U5.29 | length 372
  Top Layer w0.254: C16.2 17.486,20.407 ; R9.1 22.672,39.121 R11.1 11.576,39.121 6.47,34.015 2w.2 2w.1 6.096,25.029 6.096,21.539 8.204,19.431 16.51,19.431 17.486,20.407 ; U4.6 23.876,13.284 ; U4.3 23.876,13.284 ; U3.2 33.998,52.178 33.998,50.695 35.983,48.71 35.999,48.71 37.142,47.567 37.142,43.888 35.502,42.249 35.502,32.57 36.195,31.877 35.255,30.937 C17.1@35.255,23.9 ; C17.1 C17.1@35.255,23.9 ; U1.1 45.676,54.908 U1.1.1 ; U1.15 48.071,42.483 U1.1.1 ; U2.1 49.573,19.173 47.494,19.173 45.974,17.653 S1.2 ; v1(53.086,39.599) U1.1.1 ; J4.5 55.71,12.254 v1@55.71,14.562 ; v1(55.753,14.605) 55.947,14.799 55.947,15.307 58.78,18.14 61.091,18.14 62.068,19.117 U5.3 62.068,21.107 62.568,21.107 U5.29 ; v1(57.15,49.657) 55.318,47.825 53.413,47.825 U1.1.1 ; S2.2 v1(62.738,9.779) 62.738,7.948 50.694,7.948 50.029,8.613 50.021,8.613 v1(45.974,12.66) S1.2 ; U1.38 64.701,54.908 66.04,53.569 D6.1 66.098,52.647 66.098,50.579 66.458,50.218 66.458,46.011 D5.1 ; J2.02 75.138,32.893 75.692,32.339 75.692,34.856 77.216,36.38 ; LS1.N 78.994,16.791 78.994,22.86 77.216,24.638 77.216,36.38 ; J3.06 81.719,45.408 81.719,40.883 77.216,36.38 ; 17.486,20.407 17.486,20.132 18.009,19.609 D3.1 19.456,17.653 20.472,16.637 U4.5 20.472,13.335 20.777,13.03 23.622,13.03 23.876,13.284 ; C17.1@35.255,23.9 35.255,21.589 42.672,14.172 S1.2
  Bottom Layer w0.254: D3.1 18.557,17.105 23.54,17.105 23.994,16.651 26.917,16.651 28.008,15.56 C3.2 C2.2@45.974,15.56 ; J1.02 35.502,32.57 35.502,35.284 35.651,35.433 36.925,35.433 39.729,32.629 39.729,32.554 40.152,32.131 D1.C 40.32,32.038 R4.2 ; D1.C@40.1,32.385 40.1,38.043 41.656,39.599 v1(53.086,39.599) ; v1(45.974,12.66) C2.2@45.974,15.56 ; C4.2 C2.2 C2.2@45.974,15.56 ; v1(55.753,14.605) 55.753,13.335 57.986,11.102 58.018,11.102 59.341,9.779 v1(62.738,9.779) ; v1(57.15,49.657) 57.15,48.768 58.039,47.879 65.405,47.879 66.353,46.931 66.353,46.042 D5.1 68.18,47.733 68.786,47.733 68.795,47.743 70.559,47.743 70.825,47.477 72.515,47.477 73.383,46.609 79.644,46.609 79.771,46.482 80.645,46.482 J3.06 ; R2.2 63.257,31.172 63.581,31.496 C1.2 68.453,33.909 71.095,33.909 72.111,32.893 J2.02
GPIO0: Q2.3 R6.2 S1.1 U1.25 | length 41
  Top Layer w0.254: S1.1 v1(45.974,11.151) ; v1(58.649,26.01) 58.928,26.01 59.69,26.772 Q2.3 59.69,29.312 v1(59.106,29.896) 61.954,32.744 61.954,38.398 U1.25
  Bottom Layer w0.254: v1(45.974,11.151) 56.515,21.692 56.515,23.876 v1(58.649,26.01) ; R6.2 58.588,30.414 v1(59.106,29.896)
GPIO2: D2.A J2.04 R4.1 U1.24 | length 46
  Top Layer w0.254: v1(58.826,33.282) 58.826,33.383 59.501,34.058 U1.24 ; v1(63.932,36.703) 65.202,37.973 J2.04
  Bottom Layer w0.254: R4.1 42.23,30.456 41.402,31.284 41.402,33.469 42.182,34.249 60.468,34.249 61.277,33.44 ; v1(58.826,33.282) 58.831,33.282 59.442,32.671 60.483,32.671 D2.A 60.717,32.512 61.14,32.935 61.14,33.303 61.277,33.44 ; v1(63.932,36.703) 61.277,34.048 61.277,33.44
GPIO4: J2.05 R13.1 U1.26 | length 18.2
  Top Layer w0.254: U1.26 72.815,39.668 J2.05
  Bottom Layer w0.254: R13.1 72.642,45.249 74.498,43.393 74.498,41.351 J2.05
GPIO5: J2.08 LS1.P R8.2 U1.29 | length 74
  Top Layer w0.254: v1(51.765,32.334) 51.96,32.14 52.413,32.14 52.422,32.131 60.071,32.131 60.477,32.537 60.477,42.995 60.96,43.478 U1.29 62.996,43.688 69.723,43.688 70.316,44.281 70.316,46.397 68.346,48.367 68.346,49.002 v1(68.199,49.149) ; J2.08 74.934,46.859 74.934,35.36 72.263,32.69 72.263,22.887 74.061,21.089 LS1.P
  Bottom Layer w0.254: v1(51.765,32.334) 51.775,32.324 R8.2 ; v1(68.199,49.149) 68.272,49.222 69.055,49.222 69.255,49.022 72.771,49.022 J2.08
GPIO12: J1.04 U1.14 | length 9.2
  Top Layer w0.254: J1.04 36.322,36.904 37.816,38.398 U1.14
GPIO13: J1.03 U1.16 | length 23
  Top Layer w0.254: v1(48.235,33.274) 49.341,34.38 U1.16
  Bottom Layer w0.254: J1.03@35.956,34.139 35.965,34.13 36.124,34.29 J1.03 38.481,32.131 38.481,29.947 39.37,29.058 42.674,29.058 43.359,29.743 43.359,30.635 43.967,31.242 45.441,31.242 45.706,31.507 45.706,32.897 45.855,33.045 48.006,33.045 v1(48.235,33.274)
GPIO14: J1.05 U1.13 | length 8.6
  Top Layer w0.254: J1.05 36.52,39.37 36.818,39.668 U1.13
GPIO15: J2.03 S4.2 U1.23 | length 62.8
  Top Layer w0.254: U1.23 v1(58.231,38.506)
  Bottom Layer w0.254: S4.2 27.852,38.227 38.303,38.227 40.637,40.561 56.177,40.561 v1(58.231,38.506) 70.587,38.506 J2.03
GPIO18: J2.09 R16.2 U1.30 | length 53.7
  Top Layer w0.254: v1(56.515,47.625) 59.392,44.748 U1.30 ; J2.09 72.368,51.965 72.368,55.62 74.334,57.586 74.858,57.586 76.831,59.559 78.696,59.559 79.138,60.002 81.527,60.002 81.719,59.81 81.719,58.3 81.254,57.836 R16.2
  Bottom Layer w0.254: v1(56.515,47.625) 56.515,47.9 56.134,48.281 56.134,50.8 56.987,51.653 66.9,51.653 67.31,52.063 67.31,53.267 67.814,53.772 71.254,53.772 72.613,52.413 72.613,51.72 J2.09
GPIO19: J2.10 R14.2 U1.31 | length 46.8
  Top Layer w0.254: U1.31 63.186,46.018 63.509,45.695 63.509,45.674 63.658,45.525 64.33,45.525 64.933,44.922 67.281,44.922 67.473,45.114 67.473,46.834 67.31,46.997 67.31,48.678 67.237,48.751 67.237,49.547 67.31,49.62 67.31,53.721 72.771,59.182 75.184,59.182 76.454,60.452 77.216,60.452 77.22,60.456 81.715,60.456 82.173,59.998 82.173,54.037 81.146,53.01 R14.2 78.31,53.086 77.555,53.086 77.428,53.213 J2.10
GPIO21: J2.11 U1.33 U3.4 | length 73.2
  Top Layer w0.254: U1.33 64.091,48.558 64.623,48.026 64.623,46.843 v1(64.516,46.736)
  Bottom Layer w0.254: U3.4 34.722,46.374 34.722,42.037 35.744,41.015 51.265,41.015 56.913,46.663 57.477,47.227 57.477,47.263 57.639,47.425 63.573,47.425 64.262,46.736 v1(64.516,46.736) ; 56.395,46.355 55.372,46.355 53.975,47.752 53.975,50.927 57.76,54.712 72.619,54.712 J2.11
GPIO22: J2.14 U1.36 U3.3 | length 75.8
  Top Layer w0.254: v1(50.114,54.407) 50.198,54.323 50.96,54.323 52.915,52.368 U1.36
  Bottom Layer w0.254: U3.3 35.071,55.575 ; v1(50.114,54.407) 49.327,55.194 42.57,55.194 42.189,55.575 35.071,55.575 ; J2.14 45.085,63.373 37.795,56.083 35.579,56.083 35.071,55.575
GPIO23: J2.15 R15.2 U1.37 | length 33.8
  Top Layer w0.254: U1.37 63.017,53.407 64.286,53.407 v1(64.48,53.213) ; v1(75.565,54.737) 79.093,54.737 v1@79.742,55.386 ; R15.2 v1@79.742,55.386 ; v1(79.593,55.637) 79.593,56.043 79.996,55.64 v1@79.742,55.386
  Bottom Layer w0.254: v1(64.48,53.213) 64.48,53.488 64.77,53.778 64.77,54.025 65.003,54.258 72.807,54.258 73.286,54.737 v1(75.565,54.737) ; J2.15 75.881,63.692 75.881,59.349 v1(79.593,55.637)
GPIO27: J1.06 U1.12 | length 8.9
  Top Layer w0.254: J1.06 37.294,40.938 U1.12
IRQ: J3.05
MISO/SCL/TX: J3.04 R14.1 | length 2.4
  Top Layer w0.254: R14.1 78.449,51.497 80.71,51.497 J3.04
MOSI: J3.03 R15.1 | length 2.4
  Top Layer w0.254: R15.1 78.406,53.955 80.752,53.955 J3.03
NetD1_A: D1.A R1.2 | length 2.3
  Bottom Layer w0.254: D1.A 42.831,32.385 44.461,32.385 R1.2
NetD2_C: D2.C R2.1 | length 3.2
  Bottom Layer w0.254: R2.1 61.457,31.191 61.901,31.635 62.75,31.635 63.129,32.014 63.129,32.375 D2.C
NetD3_2: D3.2 L1.1 U4.2 | length 9.9
  Top Layer w0.254: U4.2 25.578,16.484 D3.2 26.622,19.866 L1.1
NetD5_2: D5.2 R13.2 | length 2.8
  Bottom Layer w0.254: D5.2 69.075,45.974 69.8,46.699 R13.2
NetD6_2: D6.2 R12.2 | length 3
  Bottom Layer w0.254: D6.2 68.598,52.687 70.723,52.687 71.249,52.16 R12.2
NetJ4_2: J4.2 U5.5 | length 19.9
  Top Layer w0.254: J4.2 53.706,11.303 54.011,10.998 56.007,10.998 56.312,11.303 56.312,12.827 56.667,13.183 63.5,13.183 64.208,13.891 64.208,17.58 63.068,18.72 U5.5
NetJ4_3: J4.3 U5.4 | length 15.2
  Top Layer w0.254: J4.3 54.356,16.87 54.737,17.251 v1(54.737,17.526) ; v1(59.69,17.178) 59.784,17.272 61.316,17.272 62.568,18.524 U5.4
  Bottom Layer w0.254: v1(54.737,17.526) 55.012,17.526 55.36,17.178 v1(59.69,17.178)
NetQ1_1: Q1.1 R3.1 | length 2.7
  Top Layer w0.254: R3.1 51.968,27.879 52.029,27.94 Q1.1
NetQ2_1: Q2.1 R7.1 | length 1.9
  Top Layer w0.254: Q2.1 62.636,26.416 62.702,26.35 R7.1
NetR9_2: R9.2 S3.4 | length 2.2
  Top Layer w0.254: R9.2 22.886,37.373 22.886,35.362 S3.4
NetR11_2: R11.2 S4.4 | length 2.7
  Top Layer w0.254: R11.2 17.946,37.211 S4.4
NetR17_2: R17.2 U5.9 | length 18
  Top Layer w0.254: U5.9 66.424,21.106 66.654,21.336 66.679,21.336 v1(66.679,21.586)
  Bottom Layer w0.254: R17.2 55.245,29.439 57.694,26.989 61.276,26.989 v1(66.679,21.586)
NetR18_1: R18.1 U5.26 | length 18.7
  Top Layer w0.254: U5.26 59.35,21.606 58.344,20.599 57.074,20.599 56.515,21.158 56.515,22.225 57.201,22.911 58.42,22.911 60.935,25.425 64.197,25.425 66.646,22.976 R18.1
NetR19_1: R19.1 U5.25 | length 12.7
  Top Layer w0.254: v1(57.48,21.615) 57.971,22.106 U5.25
  Bottom Layer w0.254: v1(57.48,21.615) 61.976,21.615 65.14,18.451 R19.1
OTG_ID: J4.4
RST: J2.07 J3.07 Q1.2 R7.2 U1.28 | length 70.4
  Top Layer w0.254: Q1.2 55.248,26.162 55.829,25.581 57.404,25.581 57.68,25.857 v1(57.68,28.467) ; U1.28 70.275,42.208 71.12,43.053 ; R7.2 65.141,28.26 74.48,37.599 ; v1(65.5,28.467) 74.48,37.446 74.48,37.599 ; J2.07 71.12,43.053 ; 71.12,43.053 72.448,43.053 74.48,41.021 74.48,37.599
  Bottom Layer w0.254: v1(57.68,28.467) v1(65.5,28.467) ; J2.07 77.088,45.593 78.866,43.815 J3.07
RTS: U5.24
RX0: J2.12 R19.2 U1.34 | length 76
  Top Layer w0.254: U1.34 62.957,49.657 64.814,49.657 64.962,49.508 64.962,49.486 65.278,49.17 v1(65.278,48.895)
  Bottom Layer w0.254: v1(65.278,48.895) 65.427,48.895 65.935,48.387 67.601,48.387 67.801,48.187 68.597,48.187 68.797,48.387 70.556,48.387 71.013,47.931 72.703,47.931 73.321,47.313 74.212,47.313 81.027,47.497 82.423,46.101 ; R19.2 77.789,28.502 78.576,28.502 79.14,29.066 79.14,29.853 82.423,33.136 82.423,46.101 ; J2.12 75.116,58.293 78.734,54.675 79.991,54.675 80.307,54.991 82.042,54.991 82.423,54.61 82.423,46.101
RX2: J2.06 J3.01 U1.27 | length 35
  Top Layer w0.254: U1.27 v1(64.389,40.938) ; J2.06 74.48,43.873 74.48,46.12 72.822,47.777 72.822,48.641 74.498,50.317 74.498,51.216 72.822,52.892 72.822,53.721 78.156,59.055 J3.01
  Bottom Layer w0.254: v1(64.389,40.938) 66.504,43.053 J2.06
SCK: J3.02 R16.1 | length 2.5
  Top Layer w0.254: R16.1 78.584,56.584 79.179,56.584 79.195,56.599 80.688,56.599 J3.02
TX0: J2.13 R5.2 R18.2 U1.35 | length 121.6
  Top Layer w0.254: v1(45.72,35.433) 45.72,32.741 48.743,29.718 v1(48.895,29.718) ; U1.35@62.484,51.308 62.694,51.098 U1.35 64.367,51.098 64.774,50.691 v1(65.024,50.691) ; R18.2 71.236,24.776 v1(71.247,24.765) ; v1(69.596,50.419) 69.596,52.233 69.632,52.269 69.632,54.519 71.279,56.166 v1(71.374,56.166) ; J2.13 73.736,60.909 81.903,60.909 82.677,60.136 82.677,35.052 77.67,30.045 77.67,29.972 v1(78.178,29.464)
  Bottom Layer w0.254: v1(45.72,35.433) 58.014,35.433 60.427,37.846 68.834,37.846 71.809,34.871 72.84,34.871 74.48,33.232 74.48,28.792 ; R5.2 48.238,30.287 48.807,29.718 v1(48.895,29.718) ; v1(65.024,50.691) 69.049,50.691 69.321,50.419 v1(69.596,50.419) ; v1(71.247,24.765) 71.314,24.832 72.838,24.832 74.48,26.474 74.48,28.792 ; v1(71.374,56.166) 71.374,58.547 J2.13 ; v1(78.178,29.464) 77.089,29.464 75.151,29.464 74.48,28.792
VCC3V3: R1.1
VCCUSB: D4.A J4.1 U5.8 | length 46.6
  Top Layer w0.254: D4.A 48.387,25.646 48.506,25.527 49.063,24.97 50.405,24.97 50.927,24.449 50.927,16.405 51.076,16.256 v1(52.959,16.256) 53.056,16.159 J4.1 ; U5.8 64.973,20.606 65.52,20.059 65.574,20.113 66.653,20.113 67.081,19.685 67.437,19.685 v1(69.85,22.098)
  Bottom Layer w0.254: v1(52.959,16.256) 53.162,16.256 53.616,15.802 65.513,15.802 65.989,16.278 65.989,19.536 68.551,22.098 v1(69.85,22.098)
VDD3V3: C1.1 C2.1 C3.1 J2.01 R5.1 R6.1 R8.1 R10.1 R17.1 U1.2 U2.2 U3.1 U5.6 U5.7 | length 170.6
  Top Layer w0.254: v1(31.064,32.639) 29.464,32.639 28.372,33.731 28.372,53.956 U3.1 ; v1(40.005,62.992) 40.28,62.992 40.554,62.718 40.66,62.718 43.18,60.198 43.18,54.236 43.778,53.638 U1.2 ; v1(48.006,21.717) U2.2 U2.2@50.081,21.463 ; v1(52.578,21.209) 52.853,21.209 53.134,21.49 53.226,21.49 53.91,22.174 53.914,22.17 R10.1 ; U5.6 U5.7 64.819,19.758 64.932,19.758 65.081,19.609 65.081,19.245 65.644,18.682 66.441,18.682 67.394,17.834 76.843,18.108 77.724,18.989 77.724,23.368 73.66,27.432 J2.01
  Bottom Layer w0.254: v1(31.064,32.639) 31.064,30.969 34.347,27.686 49.027,27.686 51.755,30.414 ; U3.1 35.163,57.15 37.322,59.309 39.497,59.309 40.005,59.817 v1(40.005,62.992) ; C3.1 C2.1 46.609,16.662 50.19,16.662 50.8,17.272 ; R5.1 49.073,32.197 50.856,30.414 51.755,30.414 ; v1(48.006,21.717) 50.8,18.923 50.8,17.272 ; v1(52.578,21.209) 52.578,19.05 50.8,17.272 ; v1@52.592,21.223 52.592,21.498 52.959,21.865 52.959,30.16 R8.1 ; C1.1 C1.1@68.722,31.326 ; J2.01 69.695,30.353 C1.1@68.722,31.326 ; 51.755,30.414 R8.1 ; R8.1 53.213,30.886 53.823,31.496 54.465,31.496 R17.1 56.159,32.276 56.207,32.324 R6.1 58.735,32.324 60.325,30.734 60.325,29.74 60.474,29.591 68.468,29.591 68.722,29.845 C1.1@68.722,31.326
VIN: C4.1 C16.1 D4.C J1.01 L1.2 U2.3 U4.4 | length 65.6
  Top Layer w0.254: C16.1 14.351,22.098 15.494,23.241 L1.2 ; U4.4 22.174,15.569 22.555,15.95 22.892,15.95 23.041,16.099 23.041,22.076 22.892,22.225 21.595,22.225 20.622,23.198 L1.2 ; v1(34.29,30.074) 33.426,29.21 26.232,29.21 21.954,24.932 21.595,24.932 20.622,23.959 L1.2 ; J1.01 36.449,29.337 39.014,29.337 41.3,27.051 D4.C@44.145,27.051 ; D4.C D4.C@44.145,27.051 ; v1(46.863,23.114) 46.925,23.052 49.633,23.052 49.827,23.246 U2.3 45.364,24.007 44.145,25.226 D4.C@44.145,27.051
  Bottom Layer w0.254: v1(34.29,30.074) 35.458,30.074 J1.01 ; v1(46.863,23.114) 46.863,19.812 48.101,18.574 48.101,17.492 C4.1
VN: J1.13 U1.5 | length 15.5
  Top Layer w0.254: J1.13 39.878,56.134 39.878,51.054 41.104,49.828 U1.5
VP: J1.14 U1.4 | length 16.4
  Top Layer w0.254: J1.14 40.894,57.658 40.894,51.943 41.739,51.098 U1.4
pads on no net: J4.SH1 J4.SH2 J4.SH3 J4.SH4 J4.SH5 J4.SH6 S3.1 S3.3 S4.1 S4.3 U1.17 U1.18 U1.19 U1.20 U1.21 U1.22 U1.32 U2.4 U3.S1 U3.S2 U3.S3 U3.S4 U5.1 U5.2 U5.10 U5.11 U5.12 U5.13 U5.14 U5.15 U5.16 U5.17 U5.18 U5.19 U5.20 U5.21 U5.22 U5.23 U5.27
copper on no net: | length 304.8
  Top Layer w0.254: 0,0 84.328,0 84.328,68.072 0,68.072 0,0

## Polygon pours and split planes (outlines as drawn)
GND on Bottom Layer "NONET_L-01_P-001" (solid, pour order 0): 0,68.072 84.328,68.072 84.328,0 0,0
GND on Top Layer "NONET_L-01_P-001" (solid, pour order 1): 0,68.072 84.328,68.072 84.328,0 0,0

## Text inside footprints (layer, text, board x,y; h text height)
J4: Mechanical 13 "PCB EDGE" at 58.806,8.375 h1.27